# Altium PCB SingleAntenna.PcbDoc
Units mm, origin at the board's own origin, x right, y up, seen from the top; angles counter-clockwise.
Board outline 123.88 x 102.06 mm, 2 copper layers (Top Layer, Bottom Layer); 18 components, 1 nets, 20 pads, 0 vias.
Unrouted connection lines stored in the file: 11.
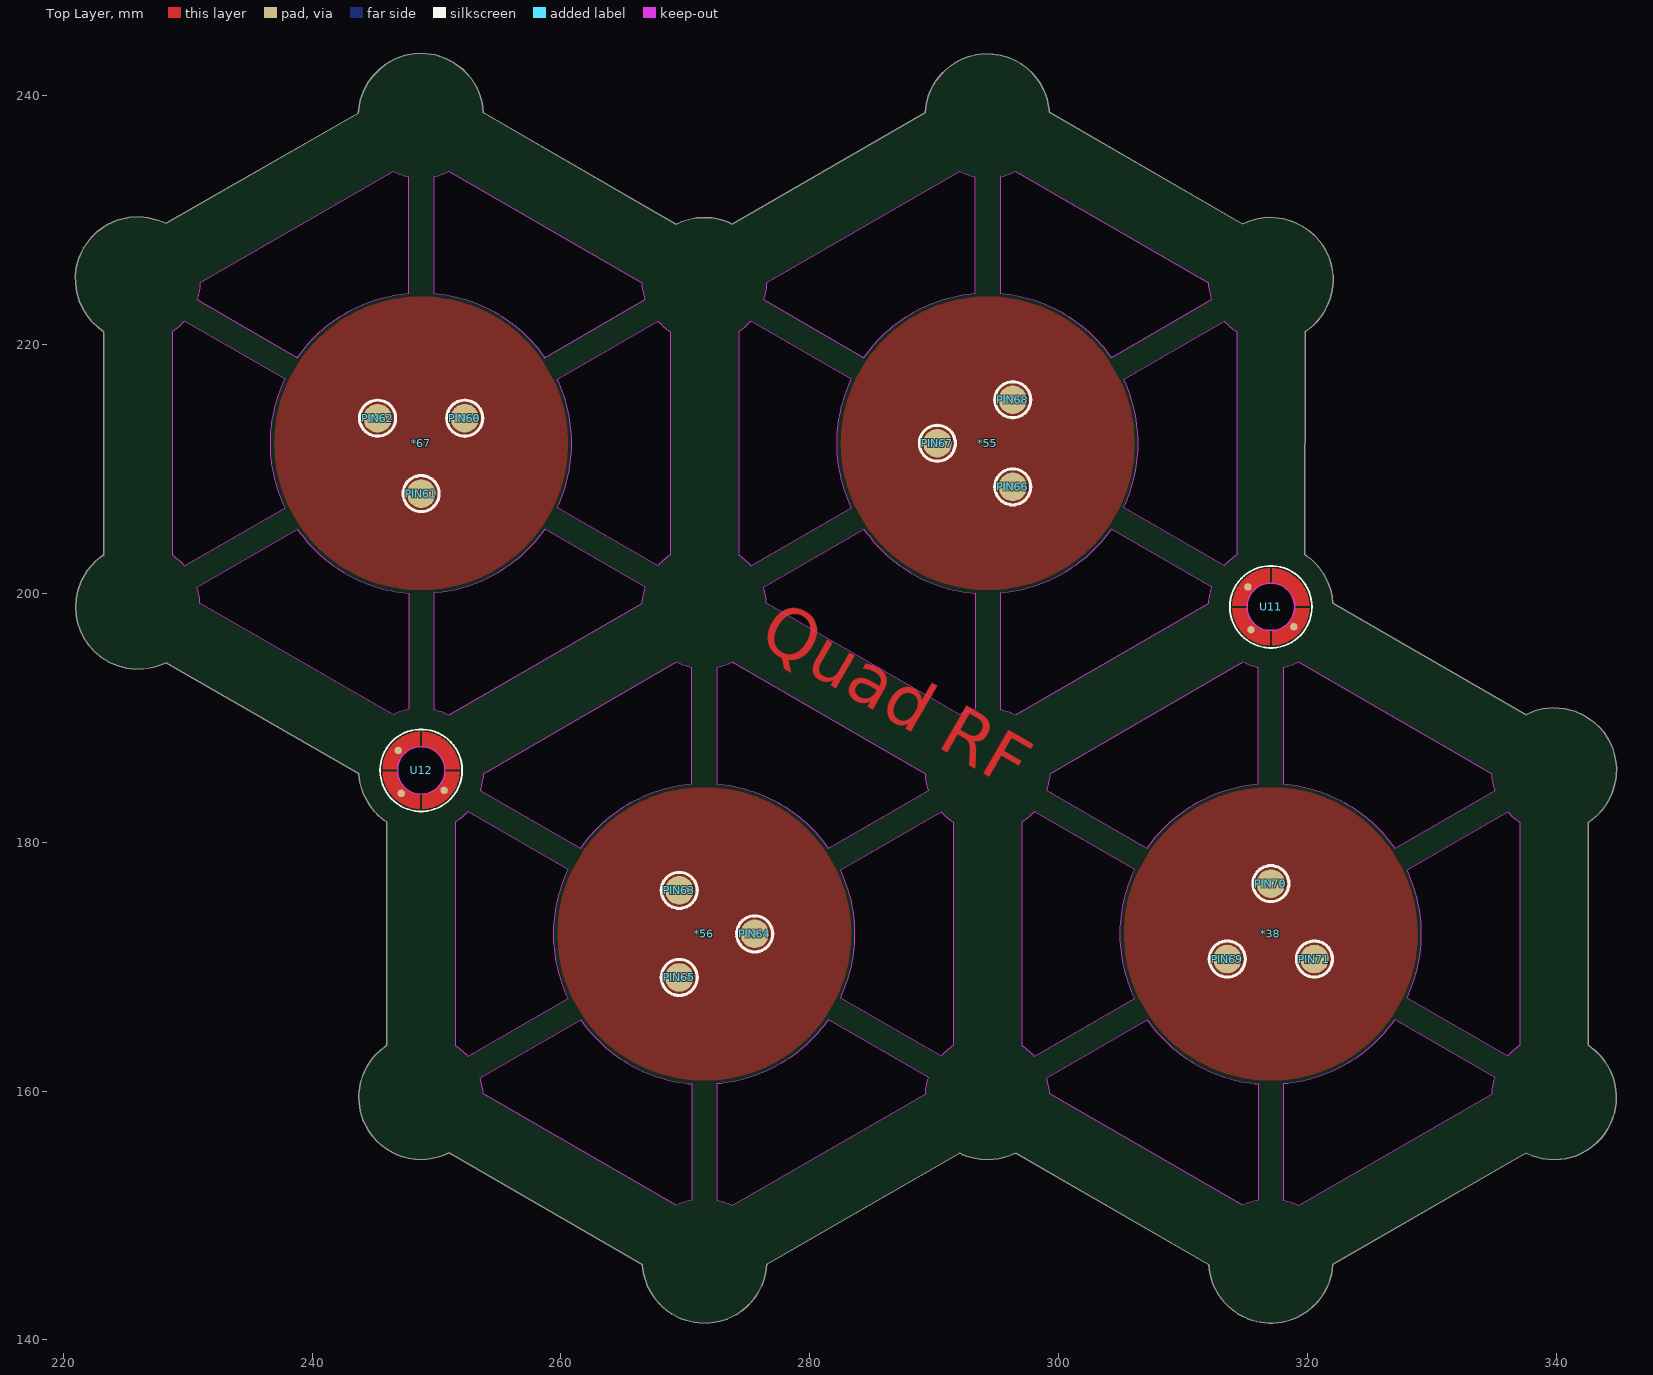
[diagram p0: Top Layer view]
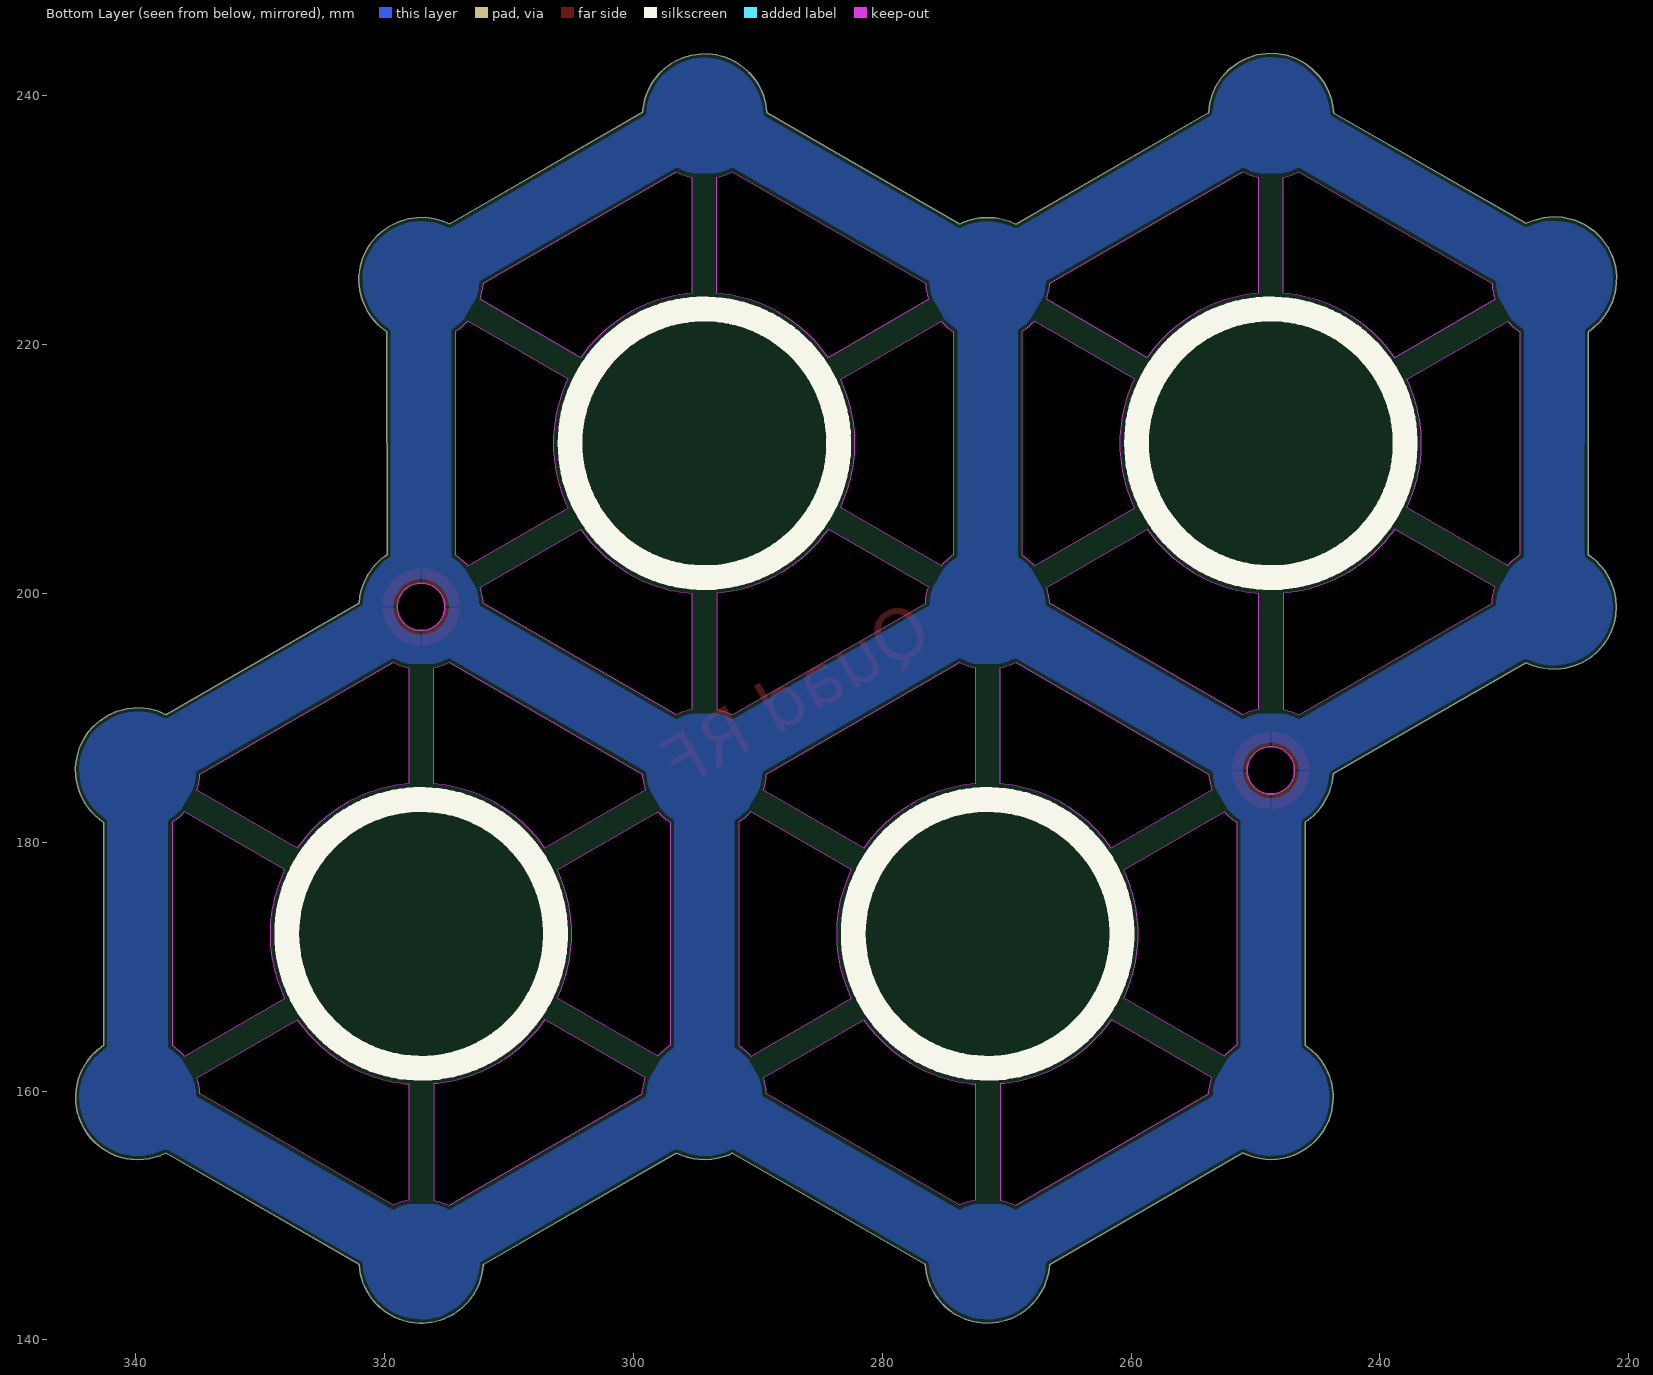
[diagram p1: Bottom Layer view, seen from below]

## Layer stack, top to bottom
Top Solder: solder mask 0.0102, Solder Resist, Dk 3.5
Top Layer: signal copper 0.0356
Dielectric 1: dielectric 0.32, FR-4, Dk 4.8
Bottom Layer: signal copper 0.0356
Bottom Solder: solder mask 0.0102, Solder Resist, Dk 3.5

## Board outline
325 vertices, not listed, extent 220.98,141.343 344.859,243.404
cut-out: 282.479,167.467 282.621,167.78 282.755,168.097 282.879,168.418 282.994,168.742 283.1,169.07 283.197,169.4 283.284,169.733 283.361,170.068 283.43,170.406 283.488,170.745 283.537,171.085 283.576,171.427 283.605,171.77 283.625,172.114 283.634,172.458 283.634,172.802 283.625,173.146 283.605,173.489 283.576,173.832 283.537,174.174 283.488,174.515 283.43,174.854 283.361,175.191 283.284,175.527 283.197,175.86 283.1,176.19 282.994,176.517 282.879,176.842 282.755,177.163 282.621,177.48 282.479,177.793 290.561,182.459 290.688,182.321 290.821,182.187 290.958,182.059 291.101,181.935 291.247,181.818 291.398,181.705 291.554,181.599 291.554,163.661 291.398,163.554 291.247,163.442 291.101,163.324 290.958,163.201 290.821,163.072 290.688,162.939 290.561,162.8
cut-out: 272.536,151.239 272.719,151.198 272.901,151.15 273.081,151.095 273.259,151.033 273.435,150.965 273.607,150.89 273.777,150.809 289.312,159.778 289.327,159.966 289.348,160.153 289.377,160.339 289.413,160.524 289.455,160.707 289.505,160.889 289.561,161.068 281.479,165.734 281.279,165.455 281.071,165.18 280.855,164.912 280.632,164.65 280.401,164.395 280.163,164.146 279.919,163.904 279.667,163.669 279.409,163.442 279.144,163.221 278.874,163.009 278.597,162.804 278.315,162.607 278.027,162.418 277.734,162.238 277.436,162.066 277.133,161.902 276.826,161.748 276.514,161.602 276.199,161.464 275.879,161.336 275.556,161.217 275.23,161.108 274.901,161.007 274.569,160.916 274.235,160.835 273.898,160.763 273.56,160.7 273.22,160.648 272.878,160.605 272.536,160.571
cut-out: 253.694,160.339 253.659,160.524 253.616,160.707 253.567,160.889 253.51,161.068 261.593,165.734 261.793,165.455 262.001,165.18 262.216,164.912 262.44,164.65 262.67,164.395 262.908,164.146 263.153,163.904 263.404,163.669 263.663,163.442 263.927,163.221 264.198,163.009 264.474,162.804 264.757,162.607 265.044,162.418 265.337,162.238 265.635,162.066 265.938,161.902 266.245,161.748 266.557,161.602 266.873,161.464 267.192,161.336 267.515,161.217 267.841,161.108 268.17,161.007 268.502,160.916 268.837,160.835 269.173,160.763 269.512,160.7 269.852,160.648 270.193,160.605 270.536,160.571 270.536,151.239 270.352,151.198 270.17,151.15 269.99,151.095 269.812,151.033 269.637,150.965 269.464,150.89 269.294,150.809 253.759,159.778 253.745,159.966 253.723,160.153
cut-out: 251.824,163.442 251.971,163.324 252.113,163.201 252.251,163.072 252.383,162.939 252.51,162.8 260.593,167.467 260.45,167.78 260.317,168.097 260.192,168.418 260.077,168.742 259.971,169.07 259.875,169.4 259.788,169.733 259.71,170.068 259.642,170.406 259.583,170.745 259.535,171.085 259.496,171.427 259.466,171.77 259.447,172.114 259.437,172.458 259.437,172.802 259.447,173.146 259.466,173.489 259.496,173.832 259.535,174.174 259.583,174.515 259.642,174.854 259.71,175.191 259.788,175.527 259.875,175.86 259.971,176.19 260.077,176.517 260.192,176.842 260.317,177.163 260.45,177.48 260.593,177.793 252.51,182.459 252.383,182.321 252.251,182.187 252.113,182.059 251.971,181.935 251.824,181.818 251.673,181.705 251.518,181.599 251.518,163.661 251.673,163.554
cut-out: 261.593,179.525 261.793,179.805 262.001,180.079 262.216,180.347 262.44,180.609 262.67,180.865 262.908,181.114 263.153,181.356 263.404,181.59 263.663,181.818 263.927,182.038 264.198,182.251 264.474,182.456 264.757,182.652 265.044,182.841 265.337,183.022 265.635,183.194 265.938,183.357 266.245,183.512 266.557,183.658 266.873,183.795 267.192,183.923 267.515,184.042 267.841,184.152 268.17,184.252 268.502,184.343 268.837,184.425 269.173,184.497 269.512,184.559 269.852,184.612 270.193,184.655 270.536,184.688 270.536,194.021 270.352,194.062 270.17,194.11 269.99,194.165 269.812,194.226 269.637,194.294 269.464,194.369 269.294,194.45 253.759,185.481 253.745,185.294 253.723,185.107 253.694,184.921 253.659,184.736 253.616,184.553 253.567,184.371 253.51,184.191
cut-out: 274.569,184.343 274.901,184.252 275.23,184.152 275.556,184.042 275.879,183.923 276.199,183.795 276.514,183.658 276.826,183.512 277.133,183.357 277.436,183.194 277.734,183.022 278.027,182.841 278.315,182.652 278.597,182.456 278.874,182.251 279.144,182.038 279.409,181.818 279.667,181.59 279.919,181.356 280.163,181.114 280.401,180.865 280.632,180.609 280.855,180.347 281.071,180.079 281.279,179.805 281.479,179.525 289.561,184.191 289.505,184.371 289.455,184.553 289.413,184.736 289.377,184.921 289.348,185.107 289.327,185.294 289.312,185.481 273.777,194.45 273.607,194.369 273.435,194.294 273.259,194.226 273.081,194.165 272.901,194.11 272.719,194.062 272.536,194.021 272.536,184.688 272.878,184.655 273.22,184.612 273.56,184.559 273.898,184.497 274.235,184.425
cut-out: 318.071,151.239 318.255,151.198 318.437,151.15 318.617,151.095 318.795,151.033 318.97,150.965 319.143,150.89 319.313,150.809 334.848,159.778 334.863,159.966 334.884,160.153 334.913,160.339 334.948,160.524 334.991,160.707 335.04,160.889 335.097,161.068 327.014,165.734 326.814,165.455 326.606,165.18 326.391,164.912 326.167,164.65 325.937,164.395 325.699,164.146 325.454,163.904 325.203,163.669 324.945,163.442 324.68,163.221 324.409,163.009 324.133,162.804 323.851,162.607 323.563,162.418 323.27,162.238 322.972,162.066 322.669,161.902 322.362,161.748 322.05,161.602 321.734,161.464 321.415,161.336 321.092,161.217 320.766,161.108 320.437,161.007 320.105,160.916 319.77,160.835 319.434,160.763 319.095,160.7 318.755,160.648 318.414,160.605 318.071,160.571
cut-out: 328.014,167.467 328.157,167.78 328.29,168.097 328.415,168.418 328.53,168.742 328.636,169.07 328.732,169.4 328.82,169.733 328.897,170.068 328.965,170.406 329.024,170.745 329.072,171.085 329.112,171.427 329.141,171.77 329.16,172.114 329.17,172.458 329.17,172.802 329.16,173.146 329.141,173.489 329.112,173.832 329.072,174.174 329.024,174.515 328.965,174.854 328.897,175.191 328.82,175.527 328.732,175.86 328.636,176.19 328.53,176.517 328.415,176.842 328.29,177.163 328.157,177.48 328.014,177.793 336.097,182.459 336.224,182.321 336.357,182.187 336.494,182.059 336.636,181.935 336.783,181.818 336.934,181.705 337.089,181.599 337.089,163.661 336.934,163.554 336.783,163.442 336.636,163.324 336.494,163.201 336.357,163.072 336.224,162.939 336.097,162.8
cut-out: 299.23,160.339 299.194,160.524 299.152,160.707 299.102,160.889 299.046,161.068 307.128,165.734 307.328,165.455 307.536,165.18 307.752,164.912 307.975,164.65 308.206,164.395 308.444,164.146 308.689,163.904 308.94,163.669 309.198,163.442 309.463,163.221 309.733,163.009 310.01,162.804 310.292,162.607 310.58,162.418 310.873,162.238 311.171,162.066 311.474,161.902 311.781,161.748 312.093,161.602 312.408,161.464 312.728,161.336 313.051,161.217 313.377,161.108 313.706,161.007 314.038,160.916 314.372,160.835 314.709,160.763 315.047,160.7 315.387,160.648 315.729,160.605 316.071,160.571 316.071,151.239 315.888,151.198 315.706,151.15 315.526,151.095 315.348,151.033 315.173,150.965 315,150.89 314.83,150.809 299.295,159.778 299.28,159.966 299.259,160.153
cut-out: 297.36,163.442 297.507,163.324 297.649,163.201 297.786,163.072 297.919,162.939 298.046,162.8 306.128,167.467 305.986,167.78 305.853,168.097 305.728,168.418 305.613,168.742 305.507,169.07 305.41,169.4 305.323,169.733 305.246,170.068 305.178,170.406 305.119,170.745 305.07,171.085 305.031,171.427 305.002,171.77 304.982,172.114 304.973,172.458 304.973,172.802 304.982,173.146 305.002,173.489 305.031,173.832 305.07,174.174 305.119,174.515 305.178,174.854 305.246,175.191 305.323,175.527 305.41,175.86 305.507,176.19 305.613,176.517 305.728,176.842 305.853,177.163 305.986,177.48 306.128,177.793 298.046,182.459 297.919,182.321 297.786,182.187 297.649,182.059 297.507,181.935 297.36,181.818 297.209,181.705 297.054,181.599 297.054,163.661 297.209,163.554
cut-out: 307.128,179.525 307.328,179.805 307.536,180.079 307.752,180.347 307.975,180.609 308.206,180.865 308.444,181.114 308.689,181.356 308.94,181.59 309.198,181.818 309.463,182.038 309.733,182.251 310.01,182.456 310.292,182.652 310.58,182.841 310.873,183.022 311.171,183.194 311.474,183.357 311.781,183.512 312.093,183.658 312.408,183.795 312.728,183.923 313.051,184.042 313.377,184.152 313.706,184.252 314.038,184.343 314.372,184.425 314.709,184.497 315.047,184.559 315.387,184.612 315.729,184.655 316.071,184.688 316.071,194.021 315.888,194.062 315.706,194.11 315.526,194.165 315.348,194.226 315.173,194.294 315,194.369 314.83,194.45 299.295,185.481 299.28,185.294 299.259,185.107 299.23,184.921 299.194,184.736 299.152,184.553 299.102,184.371 299.046,184.191
cut-out: 320.105,184.343 320.437,184.252 320.766,184.152 321.092,184.042 321.415,183.923 321.734,183.795 322.05,183.658 322.362,183.512 322.669,183.357 322.972,183.194 323.27,183.022 323.563,182.841 323.851,182.652 324.133,182.456 324.409,182.251 324.68,182.038 324.945,181.818 325.203,181.59 325.454,181.356 325.699,181.114 325.937,180.865 326.167,180.609 326.391,180.347 326.606,180.079 326.814,179.805 327.014,179.525 335.097,184.191 335.04,184.371 334.991,184.553 334.948,184.736 334.913,184.921 334.884,185.107 334.863,185.294 334.848,185.481 319.313,194.45 319.143,194.369 318.97,194.294 318.795,194.226 318.617,194.165 318.437,194.11 318.255,194.062 318.071,194.021 318.071,184.688 318.414,184.655 318.755,184.612 319.095,184.559 319.434,184.497 319.77,184.425
cut-out: 276.462,199.774 276.427,199.959 276.384,200.142 276.335,200.324 276.278,200.503 284.361,205.17 284.561,204.89 284.769,204.615 284.984,204.347 285.208,204.085 285.438,203.83 285.676,203.581 285.921,203.339 286.172,203.104 286.43,202.877 286.695,202.657 286.966,202.444 287.242,202.239 287.524,202.042 287.812,201.854 288.105,201.673 288.403,201.501 288.706,201.338 289.013,201.183 289.325,201.037 289.641,200.899 289.96,200.771 290.283,200.652 290.609,200.543 290.938,200.442 291.27,200.351 291.605,200.27 291.941,200.198 292.28,200.135 292.62,200.083 292.961,200.04 293.304,200.006 293.304,190.674 293.12,190.633 292.938,190.585 292.758,190.53 292.58,190.468 292.405,190.4 292.232,190.326 292.062,190.244 276.527,199.214 276.512,199.401 276.491,199.588
cut-out: 295.304,190.674 295.487,190.633 295.669,190.585 295.849,190.53 296.027,190.468 296.202,190.4 296.375,190.326 296.545,190.244 312.08,199.214 312.095,199.401 312.116,199.588 312.145,199.774 312.181,199.959 312.223,200.142 312.273,200.324 312.329,200.503 304.247,205.17 304.047,204.89 303.839,204.615 303.623,204.347 303.4,204.085 303.169,203.83 302.931,203.581 302.686,203.339 302.435,203.104 302.177,202.877 301.912,202.657 301.642,202.444 301.365,202.239 301.083,202.042 300.795,201.854 300.502,201.673 300.204,201.501 299.901,201.338 299.594,201.183 299.282,201.037 298.967,200.899 298.647,200.771 298.324,200.652 297.998,200.543 297.669,200.442 297.337,200.351 297.003,200.27 296.666,200.198 296.328,200.135 295.988,200.083 295.646,200.04 295.304,200.006
cut-out: 305.247,206.902 305.389,207.215 305.522,207.532 305.647,207.853 305.762,208.177 305.868,208.505 305.965,208.835 306.052,209.168 306.129,209.503 306.197,209.841 306.256,210.18 306.305,210.52 306.344,210.862 306.373,211.205 306.393,211.549 306.402,211.893 306.402,212.237 306.393,212.581 306.373,212.925 306.344,213.267 306.305,213.609 306.256,213.95 306.197,214.289 306.129,214.627 306.052,214.962 305.965,215.295 305.868,215.625 305.762,215.953 305.647,216.277 305.522,216.598 305.389,216.915 305.247,217.228 313.329,221.894 313.456,221.756 313.589,221.622 313.726,221.494 313.868,221.371 314.015,221.253 314.166,221.141 314.321,221.034 314.321,203.096 314.166,202.989 314.015,202.877 313.868,202.759 313.726,202.636 313.589,202.507 313.456,202.374 313.329,202.235
cut-out: 297.337,223.779 297.669,223.688 297.998,223.587 298.324,223.477 298.647,223.358 298.967,223.23 299.282,223.093 299.594,222.947 299.901,222.792 300.204,222.629 300.502,222.457 300.795,222.276 301.083,222.088 301.365,221.891 301.642,221.686 301.912,221.473 302.177,221.253 302.435,221.025 302.686,220.791 302.931,220.549 303.169,220.3 303.4,220.044 303.623,219.783 303.839,219.514 304.047,219.24 304.247,218.96 312.329,223.626 312.273,223.806 312.223,223.988 312.181,224.171 312.145,224.356 312.116,224.542 312.095,224.729 312.08,224.916 296.545,233.885 296.375,233.804 296.202,233.73 296.027,233.661 295.849,233.6 295.669,233.545 295.487,233.497 295.304,233.456 295.304,224.124 295.646,224.09 295.988,224.047 296.328,223.994 296.666,223.932 297.003,223.86
cut-out: 274.592,202.877 274.739,202.759 274.881,202.636 275.018,202.507 275.151,202.374 275.278,202.235 283.361,206.902 283.218,207.215 283.085,207.532 282.96,207.853 282.845,208.177 282.739,208.505 282.643,208.835 282.555,209.168 282.478,209.503 282.41,209.841 282.351,210.18 282.303,210.52 282.263,210.862 282.234,211.205 282.215,211.549 282.205,211.893 282.205,212.237 282.215,212.581 282.234,212.925 282.263,213.267 282.303,213.609 282.351,213.95 282.41,214.289 282.478,214.627 282.555,214.962 282.643,215.295 282.739,215.625 282.845,215.953 282.96,216.277 283.085,216.598 283.218,216.915 283.361,217.228 275.278,221.894 275.151,221.756 275.018,221.622 274.881,221.494 274.739,221.371 274.592,221.253 274.441,221.141 274.286,221.034 274.286,203.096 274.441,202.989
cut-out: 284.361,218.96 284.561,219.24 284.769,219.514 284.984,219.783 285.208,220.044 285.438,220.3 285.676,220.549 285.921,220.791 286.172,221.025 286.43,221.253 286.695,221.473 286.966,221.686 287.242,221.891 287.524,222.088 287.812,222.276 288.105,222.457 288.403,222.629 288.706,222.792 289.013,222.947 289.325,223.093 289.641,223.23 289.96,223.358 290.283,223.477 290.609,223.587 290.938,223.688 291.27,223.779 291.605,223.86 291.941,223.932 292.28,223.994 292.62,224.047 292.961,224.09 293.304,224.124 293.304,233.456 293.12,233.497 292.938,233.545 292.758,233.6 292.58,233.661 292.405,233.73 292.232,233.804 292.062,233.885 276.527,224.916 276.512,224.729 276.491,224.542 276.462,224.356 276.427,224.171 276.384,223.988 276.335,223.806 276.278,223.626
cut-out: 259.711,206.902 259.853,207.215 259.987,207.532 260.111,207.853 260.226,208.177 260.332,208.505 260.429,208.835 260.516,209.168 260.594,209.503 260.662,209.841 260.72,210.18 260.769,210.52 260.808,210.862 260.837,211.205 260.857,211.549 260.867,211.893 260.867,212.237 260.857,212.581 260.837,212.925 260.808,213.267 260.769,213.609 260.72,213.95 260.662,214.289 260.594,214.627 260.516,214.962 260.429,215.295 260.332,215.625 260.226,215.953 260.111,216.277 259.987,216.598 259.853,216.915 259.711,217.228 267.793,221.894 267.92,221.756 268.053,221.622 268.19,221.494 268.333,221.371 268.479,221.253 268.631,221.141 268.786,221.034 268.786,203.096 268.631,202.989 268.479,202.877 268.333,202.759 268.19,202.636 268.053,202.507 267.92,202.374 267.793,202.235
cut-out: 249.768,190.674 249.951,190.633 250.133,190.585 250.313,190.53 250.491,190.468 250.667,190.4 250.839,190.326 251.009,190.244 266.544,199.214 266.559,199.401 266.581,199.588 266.609,199.774 266.645,199.959 266.687,200.142 266.737,200.324 266.793,200.503 258.711,205.17 258.511,204.89 258.303,204.615 258.087,204.347 257.864,204.085 257.633,203.83 257.395,203.581 257.151,203.339 256.899,203.104 256.641,202.877 256.377,202.657 256.106,202.444 255.829,202.239 255.547,202.042 255.259,201.854 254.966,201.673 254.668,201.501 254.365,201.338 254.058,201.183 253.746,201.037 253.431,200.899 253.111,200.771 252.788,200.652 252.462,200.543 252.133,200.442 251.801,200.351 251.467,200.27 251.13,200.198 250.792,200.135 250.452,200.083 250.11,200.04 249.768,200.006
cut-out: 230.926,199.774 230.891,199.959 230.848,200.142 230.799,200.324 230.743,200.503 238.825,205.17 239.025,204.89 239.233,204.615 239.449,204.347 239.672,204.085 239.902,203.83 240.14,203.581 240.385,203.339 240.637,203.104 240.895,202.877 241.159,202.657 241.43,202.444 241.706,202.239 241.989,202.042 242.276,201.854 242.569,201.673 242.867,201.501 243.17,201.338 243.478,201.183 243.789,201.037 244.105,200.899 244.424,200.771 244.747,200.652 245.073,200.543 245.403,200.442 245.734,200.351 246.069,200.27 246.405,200.198 246.744,200.135 247.084,200.083 247.425,200.04 247.768,200.006 247.768,190.674 247.584,190.633 247.402,190.585 247.222,190.53 247.044,190.468 246.869,190.4 246.696,190.326 246.526,190.244 230.991,199.214 230.977,199.401 230.955,199.588
cut-out: 229.056,202.877 229.203,202.759 229.345,202.636 229.483,202.507 229.615,202.374 229.743,202.235 237.825,206.902 237.682,207.215 237.549,207.532 237.425,207.853 237.309,208.177 237.203,208.505 237.107,208.835 237.02,209.168 236.942,209.503 236.874,209.841 236.816,210.18 236.767,210.52 236.728,210.862 236.698,211.205 236.679,211.549 236.669,211.893 236.669,212.237 236.679,212.581 236.698,212.925 236.728,213.267 236.767,213.609 236.816,213.95 236.874,214.289 236.942,214.627 237.02,214.962 237.107,215.295 237.203,215.625 237.309,215.953 237.425,216.277 237.549,216.598 237.682,216.915 237.825,217.228 229.743,221.894 229.615,221.756 229.483,221.622 229.345,221.494 229.203,221.371 229.056,221.253 228.905,221.141 228.75,221.034 228.75,203.096 228.905,202.989
cut-out: 251.801,223.779 252.133,223.688 252.462,223.587 252.788,223.477 253.111,223.358 253.431,223.23 253.746,223.093 254.058,222.947 254.365,222.792 254.668,222.629 254.966,222.457 255.259,222.276 255.547,222.088 255.829,221.891 256.106,221.686 256.377,221.473 256.641,221.253 256.899,221.025 257.151,220.791 257.395,220.549 257.633,220.3 257.864,220.044 258.087,219.783 258.303,219.514 258.511,219.24 258.711,218.96 266.793,223.626 266.737,223.806 266.687,223.988 266.645,224.171 266.609,224.356 266.581,224.542 266.559,224.729 266.544,224.916 251.009,233.885 250.839,233.804 250.667,233.73 250.491,233.661 250.313,233.6 250.133,233.545 249.951,233.497 249.768,233.456 249.768,224.124 250.11,224.09 250.452,224.047 250.792,223.994 251.13,223.932 251.467,223.86
cut-out: 238.825,218.96 239.025,219.24 239.233,219.514 239.449,219.783 239.672,220.044 239.902,220.3 240.14,220.549 240.385,220.791 240.637,221.025 240.895,221.253 241.159,221.473 241.43,221.686 241.706,221.891 241.989,222.088 242.276,222.276 242.569,222.457 242.867,222.629 243.17,222.792 243.478,222.947 243.789,223.093 244.105,223.23 244.424,223.358 244.747,223.477 245.073,223.587 245.403,223.688 245.734,223.779 246.069,223.86 246.405,223.932 246.744,223.994 247.084,224.047 247.425,224.09 247.768,224.124 247.768,233.456 247.584,233.497 247.402,233.545 247.222,233.6 247.044,233.661 246.869,233.73 246.696,233.804 246.526,233.885 230.991,224.916 230.977,224.729 230.955,224.542 230.926,224.356 230.891,224.171 230.848,223.988 230.799,223.806 230.743,223.626

## Design rules (kind name [scope] priority, off if disabled: settings)
BoardOutlineClearance [All] p1: gap=0.3 ignorepadtopadclearanceinfootprint=FALSE except(0.4: Arc-SplitBarrior Arc-SplitContinuation Track-SplitBarrior Track-SplitContinuation SMDPad-SplitBarrior SMDPad-SplitContinuation THPad-SplitBarrior THPad-SplitContinuation Via-SplitBarrior Via-SplitContinuation Fill-SplitBarrior Fill-SplitContinuation Poly-SplitBarrior Poly-SplitContinuation Region-SplitBarrior Region-SplitContinuation Text-SplitBarrior Text-SplitContinuation)
Clearance "Clearance Different Nets" [All] p1: gap=0.2 ignorepadtopadclearanceinfootprint=FALSE except(0.089: Arc-Arc Arc-Track Arc-SMDPad Track-Track Track-SMDPad; 0.127: SMDPad-SMDPad SMDPad-Via THPad-Via Via-Via; 0.254: Arc-Via Arc-Text Track-Via Track-Text SMDPad-Text THPad-Text Via-Text Fill-Text Poly-Text Region-Text Text-Text; 0.5: THPad-THPad Via-Hole)
Clearance "Clearance Same Nets" [All] p2: gap=0.2 ignorepadtopadclearanceinfootprint=FALSE except(0.089: Arc-Arc Arc-Track Arc-SMDPad Track-Track Track-SMDPad SMDPad-SMDPad; 0.127: SMDPad-Via THPad-Via; 0.254: Arc-Via Arc-Text Track-Via Track-Text SMDPad-Text THPad-Text Via-Via Via-Text Fill-Text Poly-Text Region-Text Text-Text)
Clearance "Clearance Bottom Layer" [OnLayer('Bottom Layer')] p3: gap=0.203 ignorepadtopadclearanceinfootprint=TRUE except(0.254: Arc-Text Track-Text SMDPad-Text THPad-Text Via-Text Fill-Text Poly-Text Region-Text Text-Text)
Clearance "Clearance Top Layer" [OnLayer('Top Layer')] p4: gap=0.203 ignorepadtopadclearanceinfootprint=TRUE except(0.254: Arc-Text Track-Text SMDPad-Text THPad-Text Via-Text Fill-Text Poly-Text Region-Text Text-Text)
ComponentClearance [All] p1: gap=0 collisioncheckmode=3 verticalgap=2540 showdistances=FALSE
HoleSize [All] p1: absolutevalues=TRUE maxlimit=6.3 minlimit=0.2 maxpercent=80.000 minpercent=20.000
MinimumAnnularRing [All] p1: minimumring=0.13
MinimumSolderMaskSliver [All] p1: minsoldermaskwidth=0.1
PlaneConnect [All] p1: planeconnectstyle=Direct reliefexpansion=0.508 reliefentries=4 reliefconductorwidth=0.254 reliefairgap=0.254
PolygonConnect PolygonConnect_1 [All] p1: connectstyle=Direct reliefconductorwidth=0.508 reliefentries=4 polygonreliefangle="90 Angle" airgapwidth=0.254
RoutingCorners [All] p1: cornerstyle=Round minsetback=2.54 maxsetback=2.54
RoutingVias [All] p1: holewidth=0.5 width=1 viastyle="Through Hole" minholewidth=0.2 minwidth=0.35 maxholewidth=1 maxwidth=2
SilkToSilkClearance [All] p1: silktosilkclearance=0.1
SilkToSolderMaskClearance [IsPad] p1: minsilkscreentomaskgap=0.1 clearancetoexposedcopper=TRUE
SolderMaskExpansion [All] p1: expansion=0.102 istentingtop=FALSE
Width [All] p1: maxlimit=2.54 minlimit=0.089 preferedwidth=0.381
23 further rules are at their usual default settings.

## Components (designator, comment, footprint, x,y, rotation, side; value= is the part's Value field where it differs from the comment)
*38 "M" PCBCOMPONENT_1 317.071,172.63 r0 top
*55 "M" PCBCOMPONENT_1 294.304,212.065 r0 top
*56 "M" PCBCOMPONENT_1 271.536,172.63 r0 top
*67 "M" PCBCOMPONENT_1 248.768,212.065 r0 top
PIN60 "BWCD-L5.0W2.0H2.5" CONN-SMD_BWCD-L5.0W2.0H2.5 252.268,214.086 r90 top
PIN61 "BWCD-L5.0W2.0H2.5" CONN-SMD_BWCD-L5.0W2.0H2.5 248.768,208.023 r90 top
PIN62 "BWCD-L5.0W2.0H2.5" CONN-SMD_BWCD-L5.0W2.0H2.5 245.268,214.086 r90 top
PIN63 "BWCD-L5.0W2.0H2.5" CONN-SMD_BWCD-L5.0W2.0H2.5 269.515,176.13 r90 top
PIN64 "BWCD-L5.0W2.0H2.5" CONN-SMD_BWCD-L5.0W2.0H2.5 275.577,172.63 r90 top
PIN65 "BWCD-L5.0W2.0H2.5" CONN-SMD_BWCD-L5.0W2.0H2.5 269.515,169.13 r90 top
PIN66 "BWCD-L5.0W2.0H2.5" CONN-SMD_BWCD-L5.0W2.0H2.5 296.324,208.565 r90 top
PIN67 "BWCD-L5.0W2.0H2.5" CONN-SMD_BWCD-L5.0W2.0H2.5 290.262,212.065 r90 top
PIN68 "BWCD-L5.0W2.0H2.5" CONN-SMD_BWCD-L5.0W2.0H2.5 296.324,215.565 r90 top
PIN69 "BWCD-L5.0W2.0H2.5" CONN-SMD_BWCD-L5.0W2.0H2.5 313.571,170.609 r90 top
PIN70 "BWCD-L5.0W2.0H2.5" CONN-SMD_BWCD-L5.0W2.0H2.5 317.071,176.671 r90 top
PIN71 "BWCD-L5.0W2.0H2.5" CONN-SMD_BWCD-L5.0W2.0H2.5 320.571,170.609 r90 top
U11 "SMTSO2040CTJ" SMD_BD5.6-L5.6-W5.6-D3.6 317.071,198.92 r0 top
U12 "SMTSO2040CTJ" SMD_BD5.6-L5.6-W5.6-D3.6 248.768,185.775 r0 top

## Footprints (in the part's own frame and the unit in brackets; to place one, negate y for a bottom-side part, rotate by r counter-clockwise, add the part's x,y. Pads: shape width x height; smd on the part's side, far side on the other; paste and mask are expansions set on the pad)
CONN-SMD_BWCD-L5.0W2.0H2.5 [mm]
  round 2.3 smd: 1(0,0)
  silkscreen extent -1.45,-1.45 1.45,1.45
PCBCOMPONENT_1 [mm]
  Top Layer pour cut-out: 9.719,-6.697 10.652,-5.081 19.212,-10.081 18.329,-11.611
  Top Layer pour cut-out: -0.933,-11.768 0.934,-11.768 0.884,-21.681 -0.882,-21.681
  Top Layer pour cut-out: -19.246,10.035 -18.313,11.651 -9.753,6.651 -10.636,5.122
  Top Layer pour cut-out: -10.648,-5.083 -9.715,-6.699 -18.325,-11.613 -19.208,-10.083
  Top Layer pour cut-out: 18.313,11.655 19.246,10.038 10.636,5.125 9.753,6.654
  Top Layer pour cut-out: -0.934,21.682 0.932,21.682 0.882,11.768 -0.884,11.768
  Bottom Layer pour cut-out: -0.936,21.682 -18.312,11.655 -19.253,10.038 -19.203,-10.092 -18.323,-11.615 -0.884,-21.68 0.886,-21.681 18.329,-11.614 19.213,-10.081 19.248,10.04 18.313,11.654 0.932,21.682
SMD_BD5.6-L5.6-W5.6-D3.6 [mm]
  round 0.6 smd: 1(-1.844,1.6) 1(-1.6,-1.844) 1(1.844,-1.6)
  round 0.025 smd: 1(1.6,1.844)
  Top Layer region: 3.1,0.1 1.9,0.1 1.896,0.163 1.889,0.226 1.881,0.289 1.87,0.352 1.857,0.414 1.843,0.475 1.826,0.536 1.807,0.597 1.786,0.657 1.763,0.716 1.739,0.774 1.712,0.832 1.683,0.888 1.653,0.944 1.62,0.999 1.586,1.052 1.55,1.104 1.513,1.155 1.474,1.205 1.433,1.253 1.39,1.3 1.346,1.346 1.3,1.39 1.253,1.433 1.205,1.474 1.155,1.513 1.104,1.55 1.052,1.586 0.999,1.62 0.944,1.653 0.888,1.683 0.832,1.712 0.774,1.739 0.716,1.763 0.657,1.786 0.597,1.807 0.536,1.826 0.475,1.843 0.414,1.857 0.352,1.87 0.289,1.881 0.226,1.889 0.163,1.896 0.1,1.9 0.1,3.1 0.18,3.096 0.261,3.091 0.341,3.083 0.421,3.073 0.501,3.061 0.58,3.047 0.659,3.031 0.737,3.013 0.815,2.993 0.893,2.971 0.97,2.946 1.046,2.92 1.121,2.892 1.196,2.862 1.27,2.83 1.343,2.796 1.415,2.76 1.486,2.723 1.557,2.683 1.626,2.642 1.694,2.599 1.761,2.554 1.827,2.507 1.891,2.459 1.954,2.409 2.016,2.358 2.077,2.304 2.136,2.25 2.194,2.194 2.25,2.136 2.304,2.077 2.358,2.016 2.409,1.954 2.459,1.891 2.507,1.827 2.554,1.761 2.599,1.694 2.642,1.626 2.683,1.557 2.723,1.486 2.76,1.415 2.796,1.343 2.83,1.27 2.862,1.196 2.892,1.121 2.92,1.046 2.946,0.97 2.971,0.893 2.993,0.815 3.013,0.737 3.031,0.659 3.047,0.58 3.061,0.501 3.073,0.421 3.083,0.341 3.091,0.261 3.096,0.18 3.1,0.1
  Top Layer region: -0.1,3.1 -0.1,1.9 -0.163,1.896 -0.226,1.889 -0.289,1.881 -0.352,1.87 -0.414,1.857 -0.475,1.843 -0.536,1.826 -0.597,1.807 -0.657,1.786 -0.716,1.763 -0.774,1.739 -0.832,1.712 -0.888,1.683 -0.944,1.653 -0.999,1.62 -1.052,1.586 -1.104,1.55 -1.155,1.513 -1.205,1.474 -1.253,1.433 -1.3,1.39 -1.346,1.346 -1.39,1.3 -1.433,1.253 -1.474,1.205 -1.513,1.155 -1.55,1.104 -1.586,1.052 -1.62,0.999 -1.653,0.944 -1.683,0.888 -1.712,0.832 -1.739,0.774 -1.763,0.716 -1.786,0.657 -1.807,0.597 -1.826,0.537 -1.843,0.475 -1.857,0.414 -1.87,0.352 -1.881,0.289 -1.889,0.226 -1.896,0.163 -1.9,0.1 -3.1,0.1 -3.096,0.18 -3.091,0.261 -3.083,0.341 -3.073,0.421 -3.061,0.501 -3.047,0.58 -3.031,0.659 -3.013,0.737 -2.993,0.815 -2.971,0.893 -2.947,0.97 -2.92,1.046 -2.892,1.121 -2.862,1.196 -2.83,1.27 -2.796,1.343 -2.76,1.415 -2.723,1.487 -2.683,1.557 -2.642,1.626 -2.599,1.694 -2.554,1.761 -2.507,1.827 -2.459,1.891 -2.409,1.954 -2.358,2.016 -2.305,2.077 -2.25,2.136 -2.194,2.194 -2.136,2.25 -2.077,2.305 -2.016,2.358 -1.954,2.409 -1.891,2.459 -1.827,2.507 -1.761,2.554 -1.694,2.599 -1.626,2.642 -1.557,2.683 -1.487,2.723 -1.415,2.76 -1.343,2.796 -1.27,2.83 -1.196,2.862 -1.121,2.892 -1.046,2.92 -0.97,2.947 -0.893,2.971 -0.815,2.993 -0.737,3.013 -0.659,3.031 -0.58,3.047 -0.501,3.061 -0.421,3.073 -0.341,3.083 -0.261,3.091 -0.18,3.096 -0.1,3.1
  Top Layer region: -3.1,-0.1 -1.9,-0.1 -1.896,-0.163 -1.889,-0.226 -1.881,-0.289 -1.87,-0.352 -1.858,-0.414 -1.843,-0.475 -1.826,-0.536 -1.807,-0.597 -1.786,-0.657 -1.764,-0.716 -1.739,-0.774 -1.712,-0.832 -1.683,-0.888 -1.653,-0.944 -1.621,-0.999 -1.586,-1.052 -1.551,-1.104 -1.513,-1.155 -1.474,-1.205 -1.433,-1.253 -1.39,-1.3 -1.346,-1.346 -1.301,-1.39 -1.254,-1.433 -1.205,-1.474 -1.155,-1.513 -1.104,-1.55 -1.052,-1.586 -0.999,-1.62 -0.944,-1.653 -0.889,-1.683 -0.832,-1.712 -0.775,-1.739 -0.716,-1.763 -0.657,-1.786 -0.597,-1.807 -0.537,-1.826 -0.476,-1.843 -0.414,-1.857 -0.352,-1.87 -0.289,-1.881 -0.226,-1.889 -0.163,-1.896 -0.1,-1.9 -0.1,-3.1 -0.181,-3.096 -0.261,-3.091 -0.341,-3.083 -0.421,-3.073 -0.501,-3.061 -0.58,-3.047 -0.659,-3.031 -0.738,-3.013 -0.816,-2.993 -0.893,-2.971 -0.97,-2.946 -1.046,-2.92 -1.122,-2.892 -1.196,-2.862 -1.27,-2.83 -1.343,-2.796 -1.415,-2.76 -1.487,-2.723 -1.557,-2.683 -1.626,-2.642 -1.694,-2.599 -1.761,-2.554 -1.827,-2.507 -1.891,-2.459 -1.954,-2.409 -2.016,-2.358 -2.077,-2.304 -2.136,-2.25 -2.194,-2.194 -2.25,-2.136 -2.305,-2.077 -2.358,-2.016 -2.409,-1.954 -2.459,-1.891 -2.508,-1.827 -2.554,-1.761 -2.599,-1.694 -2.642,-1.626 -2.683,-1.557 -2.723,-1.486 -2.761,-1.415 -2.796,-1.343 -2.83,-1.27 -2.862,-1.196 -2.892,-1.121 -2.92,-1.046 -2.947,-0.97 -2.971,-0.893 -2.993,-0.815 -3.013,-0.737 -3.031,-0.659 -3.047,-0.58 -3.061,-0.501 -3.073,-0.421 -3.083,-0.341 -3.091,-0.261 -3.097,-0.18 -3.1,-0.1
  Top Layer region: 0.1,-3.1 0.1,-1.9 0.163,-1.896 0.226,-1.889 0.289,-1.881 0.352,-1.87 0.414,-1.858 0.475,-1.843 0.536,-1.826 0.597,-1.807 0.657,-1.786 0.716,-1.764 0.774,-1.739 0.832,-1.712 0.888,-1.683 0.944,-1.653 0.998,-1.621 1.052,-1.587 1.104,-1.551 1.155,-1.513 1.205,-1.474 1.253,-1.433 1.3,-1.39 1.346,-1.346 1.39,-1.301 1.433,-1.254 1.473,-1.205 1.513,-1.155 1.55,-1.104 1.586,-1.052 1.62,-0.999 1.653,-0.944 1.683,-0.889 1.712,-0.832 1.739,-0.775 1.763,-0.716 1.786,-0.657 1.807,-0.597 1.826,-0.537 1.843,-0.476 1.857,-0.414 1.87,-0.352 1.881,-0.289 1.889,-0.226 1.896,-0.163 1.9,-0.1 3.1,-0.1 3.096,-0.181 3.091,-0.261 3.083,-0.341 3.073,-0.421 3.061,-0.501 3.047,-0.58 3.031,-0.659 3.013,-0.738 2.993,-0.816 2.971,-0.893 2.946,-0.97 2.92,-1.046 2.892,-1.122 2.862,-1.196 2.83,-1.27 2.796,-1.343 2.76,-1.415 2.723,-1.487 2.683,-1.557 2.642,-1.626 2.599,-1.694 2.554,-1.761 2.507,-1.827 2.459,-1.891 2.409,-1.954 2.358,-2.016 2.304,-2.077 2.25,-2.136 2.194,-2.194 2.136,-2.25 2.077,-2.305 2.016,-2.358 1.954,-2.409 1.891,-2.459 1.827,-2.508 1.761,-2.554 1.694,-2.599 1.626,-2.642 1.557,-2.683 1.486,-2.723 1.415,-2.761 1.343,-2.796 1.27,-2.83 1.196,-2.862 1.121,-2.892 1.046,-2.921 0.97,-2.947 0.893,-2.971 0.815,-2.993 0.737,-3.013 0.659,-3.031 0.58,-3.047 0.501,-3.061 0.421,-3.073 0.341,-3.083 0.261,-3.091 0.18,-3.097 0.1,-3.1
  Top Layer region: 1.6,1.544 1.485,1.567 1.388,1.632 1.323,1.729 1.3,1.844 1.3,1.844 1.323,1.959 1.388,2.056 1.485,2.121 1.6,2.144 1.6,2.144 1.715,2.121 1.812,2.056 1.877,1.959 1.9,1.844 1.9,1.844 1.877,1.729 1.812,1.632 1.715,1.567 1.6,1.544
  Keep-Out Layer board cut-out: 1.9,0 1.9,-0.187 1.827,-0.554 1.684,-0.9 1.476,-1.211 1.211,-1.476 0.9,-1.684 0.554,-1.827 0.187,-1.9 -0.187,-1.9 -0.554,-1.827 -0.9,-1.684 -1.211,-1.476 -1.476,-1.211 -1.684,-0.9 -1.827,-0.554 -1.9,-0.187 -1.9,0 -1.9,0.187 -1.827,0.554 -1.684,0.9 -1.476,1.211 -1.211,1.476 -0.9,1.684 -0.554,1.827 -0.187,1.9 0.187,1.9 0.554,1.827 0.9,1.684 1.211,1.476 1.476,1.211 1.684,0.9 1.827,0.554 1.9,0.187 1.9,0 1.9,0
  Keep-Out Layer circle w0.025: c0,0 r1.9
  Keep-Out Layer region: 1.9,0 1.9,-0.187 1.827,-0.554 1.684,-0.9 1.476,-1.211 1.211,-1.476 0.9,-1.684 0.554,-1.827 0.187,-1.9 -0.187,-1.9 -0.554,-1.827 -0.9,-1.684 -1.211,-1.476 -1.476,-1.211 -1.684,-0.9 -1.827,-0.554 -1.9,-0.187 -1.9,0 -1.9,0.187 -1.827,0.554 -1.684,0.9 -1.476,1.211 -1.211,1.476 -0.9,1.684 -0.554,1.827 -0.187,1.9 0.187,1.9 0.554,1.827 0.9,1.684 1.211,1.476 1.476,1.211 1.684,0.9 1.827,0.554 1.9,0.187 1.9,0 1.9,0
  silkscreen extent -3.3,-3.29 3.3,3.29

## Part data
PIN60 PIN61 PIN62 PIN63 PIN64 PIN65 PIN66 PIN67 PIN68 PIN69 PIN70 PIN71: JLCPCB=C2826549, JLCPCB Part Class="Extended Part", LCSC Part Name=天线顶针, Manufacturer="BAT WIRELESS(蝙蝠无线)", Add into BOM=yes, Convert to PCB=yes, Datasheet=https://atta.szlcsc.com/upload/public/pdf/source/20210416/C2826549_AFE8D68941B02645C9C3BE17D86096B9.pdf, Device=BWCD-L5.0W2.0H2.3, Manufacturer Part=BWCD-L5.0W2.0H2.5, Supplier=LCSC, Supplier Footprint=-, Symbol=BWCD-L5.0W2.0H2.3
U11 U12: JLCPCB=C2916349, JLCPCB Part Class="Extended Part", LCSC Part Name=雄和远景，电路板表贴圆螺母柱，M2X4，铜镀锡,1个, Manufacturer=Sinhoo(雄和远景), Add into BOM=yes, Convert to PCB=yes, Datasheet=https://atta.szlcsc.com/upload/public/pdf/source/20211122/17CF5E24EB4D4DC090A80DE3D7DE5E21.pdf, Device=SMTSO2040CTJ, Manufacturer Part=SMTSO2040CTJ, material quality=-, Product Description=-, specifications=M2X4, Supplier=LCSC, Supplier Footprint=-, surface treatment=镀锡, Symbol=SMTSO2040CTJ

## Nets (pads, with @x,y where several pads share a name; then routed paths per layer and width w, separated by ;. In a path a pad name is that pad's centre, name@x,y a point inside that pad or via, vN(x,y) a via of type N, cw(c..) or ccw(c..) an arc to the next point about the centre after c; other vN are vias at no path point)
ANT: PIN60.1 PIN61.1 PIN62.1 PIN63.1 PIN64.1 PIN65.1 PIN66.1 PIN67.1 PIN68.1 PIN69.1 PIN70.1 PIN71.1 U11.1 U12.1

## Polygon pours and split planes (outlines as drawn)
no net on Bottom Solder "NONET_L03_P-001" (solid): 190.712,264.09 378.604,263.767 375.527,121.951 189.517,117.097
ANT on Bottom Layer "NONET_L03_P-001" (solid, pour order 2): 189.23,255.604 388.556,257.537 386.062,120.398 189.23,125.285
ANT on Top Layer "NONET_L03_P-001" (solid, pour order 6): 250.508,227.594 239.078,224.038 234.506,216.545 236.157,204.226 243.65,198.511 252.413,197.241 260.16,202.829 264.859,212.481 262.192,219.847 258.255,224.546
ANT on Top Layer "NONET_L03_P-001" (solid, pour order 5): 273.114,188.224 261.684,184.668 257.112,177.175 258.763,164.856 266.256,159.141 275.019,157.871 282.766,163.459 287.465,173.111 284.798,180.477 280.861,185.176
ANT on Top Layer "NONET_L03_P-001" (solid, pour order 4): 318.326,187.589 306.896,184.033 302.324,176.54 303.975,164.221 311.468,158.506 320.231,157.236 327.978,162.824 332.677,172.476 330.01,179.842 326.073,184.541
ANT on Top Layer "NONET_L03_P-001" (solid, pour order 3): 295.91,227.457 284.48,223.901 279.908,216.408 281.559,204.089 289.052,198.374 297.815,197.104 305.562,202.692 310.261,212.344 307.594,219.71 303.657,224.409

## Other copper
Top Layer:
  text "Quad RF" at 275.014,194.851 h7 r330

## Silkscreen, mask and mechanical layers (free items; w line width, h text height)
Top Solder:
  text "Quad RF" at 275.014,194.851 h7 r330
Bottom Solder:
  pour cut-out: 279.654,197.739 276.225,191.897 287.909,185.42 291.084,191.643
Mechanical 1:
  drawing of 2001 lines, arcs and shapes, not listed
Mechanical 2:
  drawing of 870 lines, arcs and shapes, not listed
Mechanical 3:
  drawing of 332 lines, arcs and shapes, not listed